# EAGLE board Schematic_and_CADSenior_Design_2 (EAGLE 9.6.0)
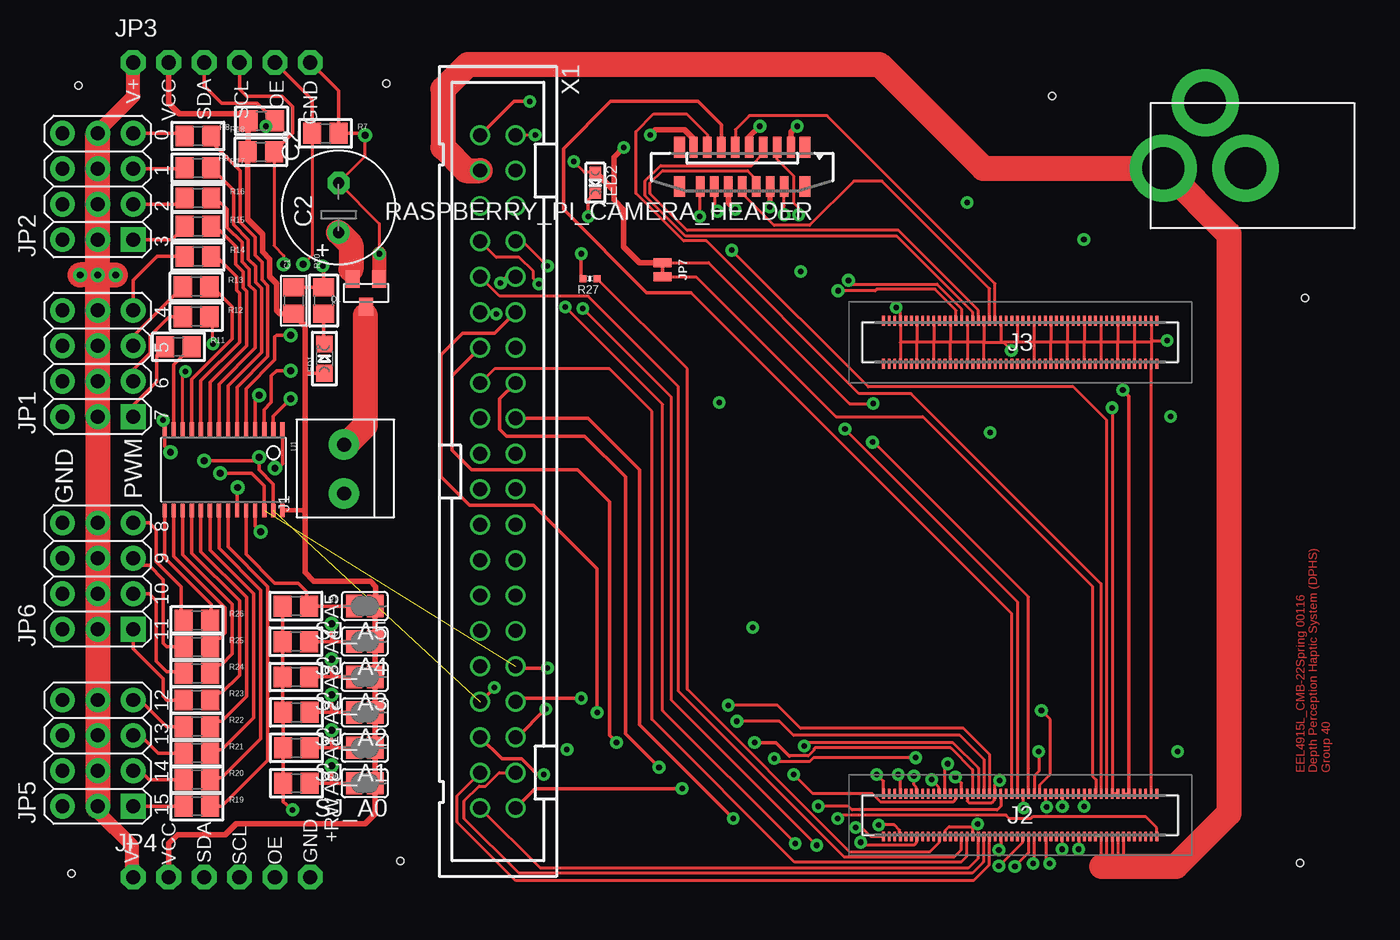
[diagram p0: board, top side]
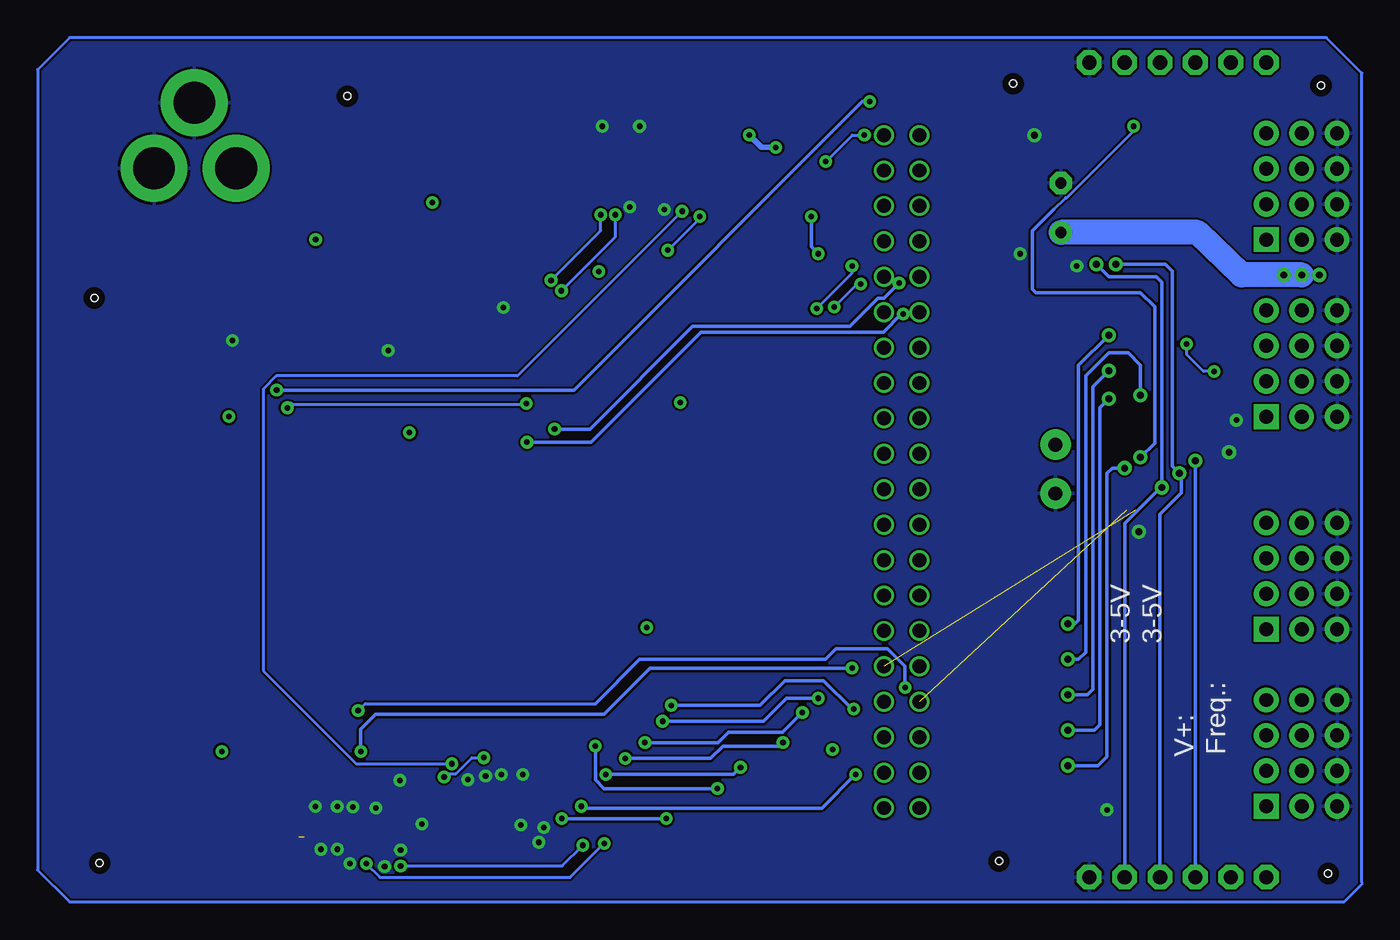
[diagram p1: board, bottom side, seen from below]

No outline drawn. Coordinates in mm, seen from the top.
Copper layers (1*16): Top 0.035mm / dielectric 1.5mm / Bottom 0.035mm
Design rules "PCBCart-Standard *": minimum track width 8mil, minimum drill 0.4mm, track to track 6mil, track to pad 6mil, pad to pad 6mil, via to via 6mil, smd to smd 6mil, copper to edge 20mil, drill to drill 8mil, minimum pad ring 8mil, minimum via ring 10mil, stop-mask expansion 3mil, vias tented up to drill 20mil, thermal gap 8mil
Holes 0.51 mm at 1.02,2.67 89.15,3.43 71.37,58.42 23.62,59.31 1.52,59.18 24.64,3.56 89.53,43.94

## Footprints (pad centres in the part's own frame; a part is rotated, then mirrored left to right if it is on the bottom)
0805@1 = smd 1.3 x 1.5: 1 -0.95,0; 2 0.95,0
E3,5-8 = drill 0.813 pad 1.6: + -1.778,0 | drill 0.813 pad 1.6 octagon: - 1.778,0
1X2-3.5MM = drill 1 pad 2.184: 1 1.8,0; 2 -1.7,0
DF40C100DS04V51 = smd 0.2 x 0.7: 1 -9.8,-1.54; 2 -9.8,1.54; 3 -9.4,-1.54; 4 -9.4,1.54; 5 -9,-1.54; 6 -9,1.54; 7 -8.6,-1.54; 8 -8.6,1.54; 9 -8.2,-1.54; 10 -8.2,1.54; 11 -7.8,-1.54; 12 -7.8,1.54; 13 -7.4,-1.54; 14 -7.4,1.54; 15 -7,-1.54; 16 -7,1.54; 17 -6.6,-1.54; 18 -6.6,1.54; 19 -6.2,-1.54; 20 -6.2,1.54; 21 -5.8,-1.54; 22 -5.8,1.54; 23 -5.4,-1.54; 24 -5.4,1.54; 25 -5,-1.54; 26 -5,1.54; 27 -4.6,-1.54; 28 -4.6,1.54; 29 -4.2,-1.54; 30 -4.2,1.54; 31 -3.8,-1.54; 32 -3.8,1.54; 33 -3.4,-1.54; 34 -3.4,1.54; 35 -3,-1.54; 36 -3,1.54; 37 -2.6,-1.54; 38 -2.6,1.54; 39 -2.2,-1.54; 40 -2.2,1.54; 41 -1.8,-1.54; 42 -1.8,1.54; 43 -1.4,-1.54; 44 -1.4,1.54; 45 -1,-1.54; 46 -1,1.54; 47 -0.6,-1.54; 48 -0.6,1.54; 49 -0.2,-1.54; 50 -0.2,1.54; 51 0.2,-1.54; 52 0.2,1.54; 53 0.6,-1.54; 54 0.6,1.54; 55 1,-1.54; 56 1,1.54; 57 1.4,-1.54; 58 1.4,1.54; 59 1.8,-1.54; 60 1.8,1.54; 61 2.2,-1.54; 62 2.2,1.54; 63 2.6,-1.54; 64 2.6,1.54; 65 3,-1.54; 66 3,1.54; 67 3.4,-1.54; 68 3.4,1.54; 69 3.8,-1.54; 70 3.8,1.54; 71 4.2,-1.54; 72 4.2,1.54; 73 4.6,-1.54; 74 4.6,1.54; 75 5,-1.54; 76 5,1.54; 77 5.4,-1.54; 78 5.4,1.54; 79 5.8,-1.54; 80 5.8,1.54; 81 6.2,-1.54; 82 6.2,1.54; 83 6.6,-1.54; 84 6.6,1.54; 85 7,-1.54; 86 7,1.54; 87 7.4,-1.54; 88 7.4,1.54; 89 7.8,-1.54; 90 7.8,1.54; 91 8.2,-1.54; 92 8.2,1.54; 93 8.6,-1.54; 94 8.6,1.54; 95 9,-1.54; 96 9,1.54; 97 9.4,-1.54; 98 9.4,1.54; 99 9.8,-1.54; 100 9.8,1.54
3X04 = drill 1 pad 1.778 square: 1 -3.81,-2.54 | drill 1 pad 1.778: 2 -3.81,0; 3 -3.81,2.54; 4 -1.27,-2.54; 5 -1.27,0; 6 -1.27,2.54; 7 1.27,-2.54; 8 1.27,0; 9 1.27,2.54; 10 3.81,-2.54; 11 3.81,0; 12 3.81,2.54
1X06-CLEANBIG = drill 1.016 pad 1.778 octagon: 1 -6.35,0; 2 -3.81,0; 3 -1.27,0; 4 1.27,0; 5 3.81,0; 6 6.35,0
SMT-JUMPER_2_NC_TRACE_NO-SILK = smd 0.635 x 1.27: 1 -0.508,0; 2 0.508,0
CHIPLED_0805 = smd 1.2 x 1.2: A 0,-1.05; C 0,1.05
CHIPLED_0603 = smd 0.8 x 0.8: A 0,-0.75; C 0,0.75
SOT23-WIDE = smd 1 x 1.27: 1 -0.95,-1; 2 0.95,-1; 3 0,1
0805 = smd 1.3 x 1.5: 1 -0.95,0; 2 0.95,0
_0402MP = smd 0.5 x 0.5: 1 -0.508,0; 2 0.508,0
52559-1592 = smd 0.6 x 1.5: 1 -3.5,-1.4; 2 -3,1.4; 3 -2.5,-1.4; 4 -2,1.4; 5 -1.5,-1.4; 6 -1,1.4; 7 -0.5,-1.4; 8 0,1.4; 9 0.5,-1.4; 10 1,1.4; 11 1.5,-1.4; 12 2,1.4; 13 2.5,-1.4; 14 3,1.4; 15 3.5,-1.4 | smd 0.8 x 1.5: M1 -4.5,-1.4; M2 4.5,-1.4; M3 4.5,1.4; M4 -4.5,1.4
SOLDERJUMPER_REFLOW_NOPASTE = smd 1.168 x 1.6: 1 -0.762,0; 2 0.762,0
TSSOP28 = smd 0.305 x 0.991: 1 -4.225,-2.918; 2 -3.575,-2.918; 3 -2.925,-2.918; 4 -2.275,-2.918; 5 -1.625,-2.918; 6 -0.975,-2.918; 7 -0.325,-2.918; 8 0.325,-2.918; 9 0.975,-2.918; 10 1.625,-2.918; 11 2.275,-2.918; 12 2.925,-2.918; 13 3.575,-2.918; 14 4.225,-2.918; 15 4.225,2.918; 16 3.575,2.918; 17 2.925,2.918; 18 2.275,2.918; 19 1.625,2.918; 20 0.975,2.918; 21 0.325,2.918; 22 -0.325,2.918; 23 -0.975,2.918; 24 -1.625,2.918; 25 -2.275,2.918; 26 -2.925,2.918; 27 -3.575,2.918; 28 -4.225,2.918
PJ-102A = drill 3 pad 4.8: RING 0.1,-3.39; RING_SW -4.6,-6.29; TIP 0.1,-9.29
PAK100/2500-40 = drill 1 pad 1.422: 1 -24.13,-1.27; 2 -24.13,1.27; 3 -21.59,-1.27; 4 -21.59,1.27; 5 -19.05,-1.27; 6 -19.05,1.27; 7 -16.51,-1.27; 8 -16.51,1.27; 9 -13.97,-1.27; 10 -13.97,1.27; 11 -11.43,-1.27; 12 -11.43,1.27; 13 -8.89,-1.27; 14 -8.89,1.27; 15 -6.35,-1.27; 16 -6.35,1.27; 17 -3.81,-1.27; 18 -3.81,1.27; 19 -1.27,-1.27; 20 -1.27,1.27; 21 1.27,-1.27; 22 1.27,1.27; 23 3.81,-1.27; 24 3.81,1.27; 25 6.35,-1.27; 26 6.35,1.27; 27 8.89,-1.27; 28 8.89,1.27; 29 11.43,-1.27; 30 11.43,1.27; 31 13.97,-1.27; 32 13.97,1.27; 33 16.51,-1.27; 34 16.51,1.27; 35 19.05,-1.27; 36 19.05,1.27; 37 21.59,-1.27; 38 21.59,1.27; 39 24.13,-1.27; 40 24.13,1.27

## Placement (x,y rotation side)
C1  10uF  [0805@1]  16.97,43.75 90 top
C2  [E3,5-8]  20.19,50.42 90 top
J1  TERMBLOCK_1X2-3.5MM  [1X2-3.5MM]  20.57,31.62 90 top
J2  P1-100  [DF40C100DS04V51]  69.09,6.86 0 top
J3  P101-200  [DF40C100DS04V51]  69.09,40.77 0 top
JP1  [3X04]  2.92,39.24 90 top
JP2  [3X04]  2.92,51.94 90 top
JP3  [1X06-CLEANBIG]  11.81,60.83 0 top
JP4  [1X06-CLEANBIG]  11.81,2.41 0 top
JP5  [3X04]  2.92,11.3 90 top
JP6  [3X04]  2.92,24 90 top
JP7  JUMPER-SMT_2_NC_TRACE_NO-SILK  [SMT-JUMPER_2_NC_TRACE_NO-SILK]  43.43,45.97 270 top
LED1  VCC  [CHIPLED_0805]  19.18,39.59 0 top
LED2  [CHIPLED_0603]  38.61,52.2 180 top
Q1  IRLML6401  [SOT23-WIDE]  22.16,44.31 180 top
R1  10K  [0805]  17.13,21.84 0 top
R2  10K  [0805]  17.13,19.3 0 top
R3  10K  [0805]  17.13,16.76 0 top
R4  10K  [0805]  17.16,14.22 0 top
R5  10K  [0805]  17.16,11.68 0 top
R6  10K  [0805]  17.16,9.14 0 top
R7  10K  [0805]  19.24,55.75 0 top
R8  10K  [0805]  14.67,56.64 180 top
R9  10K  [0805]  14.61,54.42 180 top
R10  220  [0805]  19.12,43.75 90 top
R11  220  [0805]  8.7,40.45 0 top
R12  220  [0805]  9.97,42.6 0 top
R13  220  [0805]  9.97,44.76 0 top
R14  220  [0805]  10.1,46.92 0 top
R15  220  [0805]  10.1,49.08 0 top
R16  220  [0805]  10.1,51.11 0 top
R17  220  [0805]  10.1,53.27 0 top
R18  220  [0805]  10.1,55.56 0 top
R19  220  [0805]  10.03,7.49 0 top
R20  220  [0805]  10.03,9.4 0 top
R21  220  [0805]  10.03,11.3 0 top
R22  220  [0805]  10.03,13.21 0 top
R23  220  [0805]  10.03,15.11 0 top
R24  220  [0805]  10.03,17.02 0 top
R25  220  [0805]  10.03,18.92 0 top
R26  220  [0805]  10.03,20.83 0 top
R27  1k  [_0402MP]  38.23,45.34 180 top
RASPBERRY_PI_CAMERA_HEADER  52559-1592  [52559-1592]  49.15,53.34 180 top
SJ_A0  [SOLDERJUMPER_REFLOW_NOPASTE]  22.07,9.14 180 top
SJ_A1  [SOLDERJUMPER_REFLOW_NOPASTE]  22.07,11.68 180 top
SJ_A2  [SOLDERJUMPER_REFLOW_NOPASTE]  22.07,14.22 180 top
SJ_A3  [SOLDERJUMPER_REFLOW_NOPASTE]  22.07,16.76 180 top
SJ_A4  [SOLDERJUMPER_REFLOW_NOPASTE]  22.07,19.3 180 top
SJ_A5  [SOLDERJUMPER_REFLOW_NOPASTE]  22.07,21.84 180 top
U1  PCA9685  [TSSOP28]  11.94,31.62 180 top
U$47  2.1MMJACKTHM  [PJ-102A]  88.65,53.34 270 top
X1  2540-  [PAK100/2500-40]  31.62,31.5 270 top

## Library data of the parts
C1 J1 JP1 JP2 JP5 JP6 LED1 Q1 R1-R26 SJ_A0 SJ_A1-SJ_A5 U1 = microbuilder
C2 JP3 JP4 U$47 = adafruit
J2 = SamacSys_Parts; DESCRIPTION: HIROSE(HRS) - DF40C-100DS-0.4V(51) - CONNECTOR, STACKING, RCPT, 100POS, 2ROW; HEIGHT: 1.65mm; MANUFACTURER_NAME: Hirose; MANUFACTURER_PART_NUMBER: DF40C-100DS-0.4V(51); MF: VISHAY; MOUSER_PART_NUMBER: 798-DF40C100DS0.4V51; MOUSER_PRICE-STOCK: https://www.mouser.co.uk/ProductDetail/Hirose-Connector/DF40C-100DS-04V51?qs=eDUdFcBPps2MEwbnuPvZzQ%3D%3D; MPN: MCW0406MD1003BP100; OC_NEWARK: 31W9017
J3 = SamacSys_Parts; DESCRIPTION: HIROSE(HRS) - DF40C-100DS-0.4V(51) - CONNECTOR, STACKING, RCPT, 100POS, 2ROW; HEIGHT: 1.65mm; MANUFACTURER_NAME: Hirose; MANUFACTURER_PART_NUMBER: DF40C-100DS-0.4V(51); MOUSER_PART_NUMBER: 798-DF40C100DS0.4V51; MOUSER_PRICE-STOCK: https://www.mouser.co.uk/ProductDetail/Hirose-Connector/DF40C-100DS-04V51?qs=eDUdFcBPps2MEwbnuPvZzQ%3D%3D; OC_NEWARK: unknown
JP7 = SparkFun-Jumpers; OC_NEWARK: unknown
LED2 = microbuilder; MF: OSRAM; MPN: LS Q976-NR-1; OC_NEWARK: 32AC1319
R27 = microbuilder; MF: PANASONIC; MPN: ERJ-8ENF1001V; OC_NEWARK: 64R5430
RASPBERRY_PI_CAMERA_HEADER = con-molex; OC_FARNELL: unknown; OC_NEWARK: unknown
X1 = con-3m; OC_FARNELL: unknown; OC_NEWARK: unknown

## Nets
1.8V: J2.88 J2.90 X1.1
3.3V: J2.84 J2.86 JP7.1 LED2.A RASPBERRY_PI_CAMERA_HEADER.15 X1.2
5.0V: C2.+ JP1.2 JP1.5 JP1.8 JP1.11 JP2.2 JP2.5 JP2.8 JP2.11 JP3.1 JP4.1 JP5.2 JP5.5 JP5.8 JP5.11 JP6.2 JP6.5 JP6.8 JP6.11 Q1.2
5V: J2.77 J2.79 J2.81 J2.83 J2.85 J2.87 U$47.TIP X1.3
A0: R6.2 SJ_A0.2 U1.1
A1: R5.2 SJ_A1.2 U1.2
A2: R4.2 SJ_A2.2 U1.3
A3: R3.2 SJ_A3.2 U1.4
A4: R2.2 SJ_A4.2 U1.5
A5: R1.2 SJ_A5.2 U1.24
CAM0_C_N: J3.40 RASPBERRY_PI_CAMERA_HEADER.8
CAM0_C_P: J3.42 RASPBERRY_PI_CAMERA_HEADER.9
CAM0_D0_N: J3.28 RASPBERRY_PI_CAMERA_HEADER.2
CAM0_D0_P: J3.30 RASPBERRY_PI_CAMERA_HEADER.3
CAM0_D1_N: J3.34 RASPBERRY_PI_CAMERA_HEADER.5
CAM0_D1_P: J3.36 RASPBERRY_PI_CAMERA_HEADER.6
CAM1_C_N: J3.27
CAM1_C_P: J3.29
CAM1_D2_N: J3.33
CAM1_D2_P: J3.35
CAM1_D3_N: J3.39
CAM1_D3_P: J3.41
CAM_IO0 [CAMIO]: J2.48 RASPBERRY_PI_CAMERA_HEADER.11
CAM_IO1 [CAMIO]: J2.24 RASPBERRY_PI_CAMERA_HEADER.12
CAM_SCL: J2.80 RASPBERRY_PI_CAMERA_HEADER.13
CAM_SDA: J2.82 RASPBERRY_PI_CAMERA_HEADER.14
GND: C1.2 C2.- J1.2 J2.1 J2.2 J2.7 J2.8 J2.13 J2.14 J2.22 J2.23 J2.32 J2.33 J2.42 J2.43 J2.52 J2.53 J2.59 J2.60 J2.65 J2.66 J2.71 J2.74 J2.98 J3.7 J3.8 J3.13 J3.14 J3.19 J3.20 J3.25 J3.26 J3.31 J3.32 J3.37 J3.38 J3.44 J3.50 J3.55 J3.56 J3.61 J3.62 J3.67 J3.68 J3.73 J3.74 J3.79 J3.80 J3.85 J3.86 J3.91 J3.92 J3.97 J3.98 JP1.3 JP1.6 JP1.9 JP1.12 JP2.3 JP2.6 JP2.9 JP2.12 JP3.6 JP4.6 JP5.3 JP5.6 JP5.9 JP5.12 JP6.3 JP6.6 JP6.9 JP6.12 Q1.1 R1.1 R2.1 R3.1 R4.1 R5.1 R6.1 R7.2 R10.2 RASPBERRY_PI_CAMERA_HEADER.1 RASPBERRY_PI_CAMERA_HEADER.4 RASPBERRY_PI_CAMERA_HEADER.7 RASPBERRY_PI_CAMERA_HEADER.10 U1.14 U1.25 U$47.RING U$47.RING_SW
GPIO4: J2.54 X1.11
GPIO5: J2.34 X1.12
GPIO6: J2.30 X1.13
GPIO14: J2.55 X1.7
GPIO15: J2.51 X1.8
GPIO16: J2.29 X1.9
GPIO17: J2.50 X1.10
GPIO_VREF: J2.78 JP7.2
I2C_LIDAR_SCL_0: J2.35 X1.39
I2C_LIDAR_SDA_0: J2.36 X1.40
N$1: LED1.C R10.1
N$2: JP1.4 R12.1
N$3: JP1.1 R11.1
N$4: JP1.7 R13.1
N$5: JP1.10 R14.1
N$6: JP2.1 R15.1
N$7: JP2.4 R16.1
N$8: JP2.7 R17.1
N$9: JP2.10 R18.1
N$10: JP6.10 R26.1
N$11: JP6.7 R25.1
N$12: JP6.4 R24.1
N$13: JP6.1 R23.1
N$14: JP5.10 R22.1
N$15: JP5.7 R21.1
N$16: JP5.4 R20.1
N$17: JP5.1 R19.1
N$18: LED2.C R27.2
N$19: J2.19
N$20: J3.2
N$21: J3.4
N$22: J3.6
N$24: J3.10
N$25: J2.25
N$26: J3.11
N$27: J2.27
N$28: J3.12
N$29: X1.4
N$30: X1.5
N$31: J3.15
N$32: J3.16
N$33: J3.17
N$35: J3.18
N$36: J3.21
N$37: J3.22
N$41: J2.41
N$42: J3.23
N$43: J3.24
N$45: J2.45
N$46: J2.46
N$47: J2.47
N$53: X1.14
N$56: J2.57
N$60: X1.17
N$62: X1.19
N$64: X1.20
N$65: X1.21
N$67: X1.22
N$68: J2.68
N$69: X1.23
N$70: J2.70
N$71: X1.24
N$72: J2.72
N$75: X1.25
N$77: X1.26
N$78: J3.43
N$79: X1.27
N$80: X1.28
N$81: J3.45
N$83: J3.46
N$84: J3.47
N$85: J3.48
N$86: J3.49
N$87: X1.29
N$88: X1.30
N$90: J3.52
N$92: X1.31
N$93: J3.54
N$96: X1.6
N$99: J3.57
N$100: J3.58
N$101: J3.59
N$102: J3.60
N$105: J3.63
N$106: J3.64
N$107: J3.65
N$108: J3.66
N$110: J2.75
N$111: J3.69
N$112: J2.73
N$113: J3.71
N$114: J2.67
N$115: J2.69
N$116: J2.63
N$117: J3.75
N$118: J2.61
N$119: J3.77
N$121: J2.26
N$123: J3.81
N$125: J3.83
N$129: J3.87
N$131: J3.89
N$135: J3.93
N$136: J3.94
N$137: J3.95
N$138: J3.96
OE: JP3.5 JP4.5 R7.1 U1.23
PI_NLED_ACTIVITY: J2.21 R27.1
POWER: J2.99 X1.18
PWM0: R18.2 U1.6
PWM1: R17.2 U1.7
PWM2: R16.2 U1.8
PWM3: R15.2 U1.9
PWM4: R14.2 U1.10
PWM5: R13.2 U1.11
PWM6: R12.2 U1.12
PWM7: R11.2 U1.13
PWM8: R26.2 U1.15
PWM9: R25.2 U1.16
PWM10: R24.2 U1.17
PWM11: R23.2 U1.18
PWM12: R22.2 U1.19
PWM13: R21.2 U1.20
PWM14: R20.2 U1.21
PWM15: R19.2 U1.22
PWRIN: J1.1 Q1.3
SCL: J2.56 JP3.4 JP4.4 R9.1 U1.26 X1.32
SDA: J2.58 JP3.3 JP4.3 R8.1 U1.27 X1.33
SPEAKER0: J2.31 X1.15
SPEAKER1: J2.28 X1.16
SPI_ACCELEROMETER_CE0_N: J2.39 X1.37
SPI_ACCELEROMETER_CE1_N: J2.37 X1.38
SPI_ACCELEROMETER_MIS0: J2.40 X1.36
SPI_ACCELEROMETER_MOS1: J2.44 X1.35
SPI_ACCELEROMETER_SCLK: J2.38 X1.34
VCC: C1.1 JP3.2 JP4.2 LED1.A R8.2 R9.2 SJ_A0.1 SJ_A1.1 SJ_A2.1 SJ_A3.1 SJ_A4.1 SJ_A5.1 U1.28

## Tracks (layer width: path | path; a pad name or v marks a point on that pad's centre or on a via)
1.8V  (via drill 0.4)
  Top 0.203: J2.88 J2.90
  Top 0.254: J2.90 76.89,36.9 v76.45,37.34 | v33.91,58.04 32.77,58.04 X1.1
  Bottom 0.254: v76.45,37.34 55.12,37.34 34.42,58.04 v33.91,58.04
3.3V  (via drill 0.4)
  Top 0.203: v58.55,36.38 56.84,36.38 46.74,46.48 JP7.1 | J2.86 J2.84 v75.69,36.07 | LED2.A 37.83,52.95 v37.05,53.72 | v34.29,55.63 X1.2
  Top 0.381: 39.94,51.62 LED2.A | 39.94,51.62 39.94,50.98 40.64,50.28 40.64,47.62 41.78,46.48 JP7.1 | 39.94,51.62 39.94,54.03 v40.64,54.74 | v42.55,55.63 42.93,56.01 45.02,56.01 45.65,55.38 RASPBERRY_PI_CAMERA_HEADER.15
  Bottom 0.203: 75.44,36.32 58.6,36.32 | v37.05,53.72 35.15,55.63 v34.29,55.63
  Bottom 0.381: v75.69,36.07 75.44,36.32 | 58.6,36.32 v58.55,36.38 | v40.64,54.74 41.66,54.74 v42.55,55.63
5.0V  (via drill 0.5)
  Top 0.254: 21.08,45.97 21.08,45.44 Q1.2 | JP2.11 2.92,55.88 | JP5.2 2.92,7.11
  Top 1.016: JP3.1 5.46,58.42 2.92,55.88 | 2.92,7.11 5.33,4.7 5.33,2.54 JP4.1
  Top 1.778: JP2.11 JP2.8 JP2.5 JP2.2 v2.92,45.59 | v2.92,45.59 JP1.11 JP1.8 JP1.5 JP1.2 JP6.11 JP6.8 JP6.5 JP6.2 JP5.11 JP5.8 JP5.5 JP5.2 | C2.+ 21.08,47.75 21.08,45.97 | v2.92,45.59 v4.19,45.59 | v2.92,45.59 v1.65,45.59
  Bottom 1.778: C2.+ 10.41,48.64 7.24,45.59 v2.92,45.59
5V  (1 unrouted)
  Top 0.203: J2.79 74.89,3.22 74.93,3.17 75.29,3.53 | J2.87 76.49,3.27 | 76.49,3.27 76.58,3.17 | J2.85 76.09,3.67 76.49,3.27 | J2.83 75.69,3.93 75.29,3.53 | J2.81 75.29,3.53
  Top 1.778: X1.3 29.34,53.09 27.69,54.74 27.69,58.93 29.46,60.71 58.98,60.71 66.45,53.24 U$47.TIP 84.07,48.52 84.07,6.99 80.26,3.17 76.58,3.17 74.93,3.17
A0  (via drill 0.5)
  Top 0.254: 19.68,9.14 SJ_A0.2 | v19.68,10.41 19.68,9.14 | 19.68,9.14 R6.2 | v15.62,31.75 15.88,31.75 16.16,32.04 U1.1
  Bottom 0.254: v19.68,10.41 17.53,10.41 16.89,11.05 16.89,31.37 16.51,31.75 v15.62,31.75
A1  (via drill 0.5)
  Top 0.254: 19.68,11.68 SJ_A1.2 | v19.68,12.95 19.68,11.68 | 19.68,11.68 R5.2 | U1.2 15.51,35.45 v16.76,36.7
  Bottom 0.254: v19.68,12.95 17.78,12.95 17.4,13.34 17.4,36.07 v16.76,36.7
A2  (via drill 0.5)
  Top 0.254: 19.68,14.22 SJ_A2.2 | v19.68,15.49 19.68,14.22 | 19.68,14.22 R4.2 | U1.3 14.86,35.95 15.37,36.45 15.37,38.35 15.75,38.73 v16.76,38.73
  Bottom 0.254: v19.68,15.49 18.29,15.49 17.91,15.88 17.91,37.59 v16.76,38.73
A3  (via drill 0.5)
  Top 0.254: 19.68,16.76 SJ_A3.2 | v19.68,18.03 19.68,16.76 | 19.68,16.76 R3.2 | U1.4 14.21,36.69 v14.48,36.96
  Bottom 0.254: v19.68,18.03 18.92,18.03 18.41,18.54 18.41,38.35 16.76,40.01 15.37,40.01 14.48,39.12 v14.48,36.96
A4  (via drill 0.5)
  Top 0.254: 19.68,19.3 SJ_A4.2 | v19.68,20.57 19.68,19.3 | 19.68,19.3 R2.2 | v16.76,41.27 15.75,41.27 15.62,41.15 15.62,39.5 13.56,37.44 U1.5
  Bottom 0.254: v19.68,20.57 19.18,20.57 18.92,20.83 18.92,39.12 v16.76,41.27
A5
  Top 0.254: U1.24 13.56,25.55 15.62,23.5 17.27,23.5 17.91,22.86 17.91,22.02 R1.2 SJ_A5.2
CAM0_C_N
  Top 0.203: J3.40 66.89,44.62 59.18,52.32 57.15,52.32 53.98,49.15 51.44,49.15 49.15,51.44 RASPBERRY_PI_CAMERA_HEADER.8
CAM0_C_P
  Top 0.203: J3.42 67.29,44.98 55.24,57.02 49.66,57.02 48.65,56.02 RASPBERRY_PI_CAMERA_HEADER.9
CAM0_D0_N  (via drill 0.4)
  Top 0.203: J3.28 64.49,43.06 62.97,44.58 58.8,44.58 58.69,44.46 v56.02,44.46 | RASPBERRY_PI_CAMERA_HEADER.2 52.15,50.78 52.15,50.57 v52.15,49.91
  Bottom 0.203: v56.02,44.46 52.15,48.33 v52.15,49.91
CAM0_D0_P  (via drill 0.4)
  Top 0.203: v56.77,45.21 57.05,44.93 63.12,44.93 64.89,43.17 J3.30 | RASPBERRY_PI_CAMERA_HEADER.3 51.65,53.89 52.85,52.68 52.85,50.74 53.21,50.38 v53.21,49.91
  Bottom 0.203: v56.77,45.21 53.21,48.77 v53.21,49.91
CAM0_D1_N
  Top 0.203: J3.34 65.69,42.94 60.24,48.39 45.09,48.39 42.19,51.29 42.19,52.34 43.29,53.44 49.8,53.44 50.65,54.29 RASPBERRY_PI_CAMERA_HEADER.5
CAM0_D1_P
  Top 0.203: J3.36 66.09,43.06 60.36,48.79 45.19,48.79 42.55,51.44 42.55,52.2 43.43,53.09 49.53,53.09 50.15,52.47 RASPBERRY_PI_CAMERA_HEADER.6
CAM_IO0
  Top 0.203: 45.97,58.04 46.04,57.98 | 45.47,44.32 68.49,21.3 J2.48
  Top 0.254: 45.47,44.32 42.29,44.32 36.32,50.29 36.32,54.65 39.71,58.04 45.97,58.04 | 46.04,57.98 47.65,56.36 RASPBERRY_PI_CAMERA_HEADER.11
CAM_IO1  (via drill 0.4)
  Top 0.203: J2.24 63.69,10.35 v63.88,10.54 | RASPBERRY_PI_CAMERA_HEADER.12 47.15,50.39 v47.37,50.16
  Bottom 0.203: v47.37,50.16 59.18,38.35 76.47,38.35 77.42,37.41 77.42,17.22 70.74,10.54 v63.88,10.54
CAM_SCL
  Top 0.203: RASPBERRY_PI_CAMERA_HEADER.13 46.65,55.66 45.16,57.15 42.8,57.15 41.53,55.88 41.53,51.45 44.94,48.03 46.58,48.03 57.53,37.08 61.26,37.08 74.89,23.45 J2.80
CAM_SDA  (via drill 0.4)
  Top 0.203: v48.39,47.37 58.19,37.57 72.92,37.57 75.29,35.2 J2.82 | v46.1,49.78 46.1,51.89 RASPBERRY_PI_CAMERA_HEADER.14
  Bottom 0.203: v48.39,47.37 46.1,49.66 v46.1,49.78
GND  (via drill 0.4, 0.5)
  Top 0.203: J3.20 62.89,40.77 | J3.19 62.89,40.77 | 60.49,40.77 J3.8 60.49,42.97 v60.2,43.26 | 60.49,40.77 J3.7 | J3.13 61.69,40.77 | J3.14 61.69,40.77 | J3.26 64.09,40.77 | J3.25 64.09,40.77 | J3.32 65.29,40.77 | 65.29,40.77 J3.31 | J3.38 66.49,40.77 | J3.37 66.49,40.77 | J3.44 67.69,40.77 | 66.49,40.77 67.69,40.77 | 66.49,40.77 65.29,40.77 | 65.29,40.77 64.09,40.77 | 64.09,40.77 62.89,40.77 | 62.89,40.77 61.69,40.77 | 61.69,40.77 60.49,40.77 | J3.56 70.09,40.77 | 70.09,40.77 J3.55 | 70.09,40.77 68.83,40.77 | 68.83,40.77 67.87,40.77 | J3.68 72.49,40.77 | J3.67 72.49,40.77 | J3.61 71.29,40.77 | J3.62 71.29,40.77 | J3.74 73.69,40.77 | J3.73 73.69,40.77 | J3.80 74.89,40.77 | 74.89,40.77 J3.79 | J3.86 76.09,40.77 | J3.85 76.09,40.77 | J3.92 77.29,40.77 | 77.29,40.77 J3.91 | J3.98 78.49,41.02 | 78.49,41.02 78.49,40.77 | 78.49,40.77 J3.97 J2.98 | 78.49,40.77 77.29,40.77 | 77.29,40.77 76.09,40.77 | 76.09,40.77 74.89,40.77 | 74.89,40.77 73.69,40.77 | 73.69,40.77 72.49,40.77 | 72.49,40.77 71.29,40.77 | 71.29,40.77 70.09,40.77 | J3.50 68.89,40.82 68.83,40.77 | 67.69,40.77 67.87,40.77 | 67.87,40.77 v68.45,40.18 | v71.2,3.39 70.94,3.65 70.94,4.22 70.93,4.23 70.93,5.27 J2.59 | v67.62,9.35 67.29,9.02 J2.42 67.24,8.35 67.24,7.94 67.05,7.75 65.41,7.75 65.29,7.86 J2.32 | v22.1,55.63 22.1,54.1 C2.- 23.11,49.28 v23.11,47.12 | 78.49,41.02 78.61,40.89 v79.63,40.89 | U1.14 7.71,35.07 v7.6,35.18 | 19.12,46.16 v19.05,46.23 | J2.65 v72.09,4.41 | J2.71 v73.29,4.41 | J2.53 69.69,4.16 v68.71,3.17 | J2.52 69.29,7.42 v69.34,7.37 | J2.60 70.89,7.55 v70.99,7.44 | J2.66 72.11,8.38 v72.11,7.47 | J2.74 v73.69,7.49 v73.67,7.48 | J2.22 63.24,8.44 63.24,8.85 62.74,9.36 v62.74,9.4 | J2.14 61.64,8.44 61.64,8.85 61.47,9.03 v61.47,9.65
  Top 0.203: J2.8 60.49,9.62 v60.33,9.78 | J2.2 59.29,9.29 v58.8,9.78 | J2.43 67.69,4.49 v67.56,4.36 | J2.33 65.69,5.87 65.85,6.03 | 65.85,6.03 v66.04,6.22 | J2.13 61.64,5.27 61.64,4.86 61.49,4.71 57.83,4.71 57.66,4.89 v57.66,4.91 | J2.7 60.44,5.36 60.44,5.77 60.06,6.15 v58.93,6.15 | J2.1 58.4,5.32 57.75,5.97 v57.28,5.97 | J2.23 63.73,5.36 63.73,5.77 63.99,6.03 65.85,6.03
  Top 0.254: v23.11,47.12 22.83,47.09 | R1.1 R2.1 R3.1 16.18,14.26 R4.1 R5.1 R6.1 16.21,7.83 v16.89,7.24 | 17.03,44.77 C1.2 R10.2 19.12,46.16 | U1.14 7.71,33.31 v8.13,32.89 | U1.25 14.21,27.57 v14.61,27.18 | JP3.6 20.19,58.8 R7.2 21.97,55.75 v22.1,55.63
  Top 0.381: RASPBERRY_PI_CAMERA_HEADER.7 49.65,55.49 v50.42,56.26 | RASPBERRY_PI_CAMERA_HEADER.1 52.65,55.82 v53.09,56.26 | RASPBERRY_PI_CAMERA_HEADER.10 48.15,50.78 v48.64,50.29 | RASPBERRY_PI_CAMERA_HEADER.4 51.15,50.51 v51.11,50.48
  Top 1.016: Q1.1 v23.11,47.12
  Bottom 0.203: v7.6,35.18 7.6,35.45 7.49,35.56 | v19.05,46.23 19.05,46.61
  Bottom 0.254: v22.1,55.63 21.84,55.5
  pour Bottom: -2.54,1.91 0.25,-0.89 0.25,-1.02 92.96,-1.02 93.09,-0.89 95.12,1.14 95.12,3.17 95.38,3.43 95.38,61.34 92.71,64.01 91.95,64.01 0.51,64.01 0.25,63.75 -2.79,60.71 -2.79,60.45 -2.79,2.16
GPIO4  (via drill 0.4)
  Top 0.203: J2.54 69.69,10.2 69.69,22.51 58.6,33.6
  Top 0.254: 58.6,33.6 v58.49,33.6 | v31.5,42.8 30.48,42.8 X1.11
  Bottom 0.254: v58.49,33.6 53.9,33.6 46,41.5 32.91,41.5 31.62,42.8 v31.5,42.8
GPIO5  (via drill 0.4)
  Top 0.203: 52.55,11.07 52.58,11.1 53.89,11.1 54.3,11.52 54.3,11.63 54.36,11.68 64.1,11.68 65.67,10.12 65.67,8.42 J2.34
  Top 0.254: 52.55,11.07 51.56,12.06 v50.04,12.06 v50.03,12.06 | v38.73,14.22 38.73,24.51 34.16,29.08 29.59,29.08 27.56,31.11 27.56,39.88 29.08,41.4 31.37,41.4 X1.12
  Bottom 0.254: v50.03,12.06 44.78,12.06 44.04,12.8 40.16,12.8 v38.73,14.22
GPIO6  (via drill 0.4)
  Top 0.203: J2.30 64.89,9.15 v64.44,9.6 | v61.59,10.98 54.26,10.98 53.98,10.69 52.07,10.69 51.97,10.69 51.66,10.69 v51.44,10.92
  Top 0.254: v40.13,12.06 39.62,12.57 39.62,29.34 37.34,31.62 29.72,31.62 28.32,33.02 28.32,38.35 X1.13
  Bottom 0.203: v64.44,9.6 64.21,9.83 63.59,9.83 62.45,10.98 v61.59,10.98
  Bottom 0.254: v51.44,10.92 45.34,10.92 44.45,11.81 40.39,11.81 v40.13,12.06
GPIO14  (via drill 0.4)
  Top 0.203: J2.55 70.09,3.44 v70.03,3.38 | v52.96,4.83 43.43,14.35 43.43,36.32 v36.45,43.31 | v34.54,44.96 34.16,45.34 34.16,45.85 33.15,46.86 31.5,46.86 X1.7
  Bottom 0.203: v70.03,3.38 69.03,2.38 55.4,2.38 v52.96,4.83 | v36.45,43.31 34.8,44.96 v34.54,44.96
GPIO15  (via drill 0.4)
  Top 0.203: J2.51 69.24,5.27 69.24,4.86 67.6,3.22 v67.56,3.22 | v54.48,4.7 44.07,15.11 44.07,36.83 v37.72,43.18 | v35.18,46.23 33.4,48.01 X1.8
  Bottom 0.203: v67.56,3.22 55.96,3.22 v54.48,4.7 | v37.72,43.18 35.18,45.72 v35.18,46.23
GPIO16
  Top 0.203: J2.29 64.84,5.27 64.84,4.36 64.34,3.85 56.48,3.85 44.58,15.75 44.58,37.59 38.1,44.07 31.75,44.07 X1.9
GPIO17  (via drill 0.4)
  Top 0.203: v56.52,34.54 68.89,22.17 J2.50
  Top 0.254: v31.81,45.01 32.26,45.47 X1.10
  Bottom 0.254: v56.52,34.54 53.98,34.54 46.61,41.91 35.31,41.91 33.3,43.92 32.9,43.92 v31.81,45.01
GPIO_VREF
  Top 0.203: JP7.2 45.85,45.47 55.88,35.43 62.1,35.43 74.28,23.26 74.28,9.65 74.53,9.4 74.53,8.44 J2.78
I2C_LIDAR_SCL_0
  Top 0.203: J2.35 66.04,5.27 66.04,3.72 65.37,3.05 34.67,3.05 X1.39
I2C_LIDAR_SDA_0  (via drill 0.4)
  Top 0.203: 53.85,12.06 64.26,12.06 66.09,10.24 J2.36
  Top 0.254: v44.83,8.76 34.29,8.76 X1.40 | v53.59,11.81 53.85,12.06
  Bottom 0.254: v53.59,11.81 53.59,9.4 52.96,8.76 v44.83,8.76
N$1
  Top 0.254: LED1.C 19.12,40.7 R10.1
N$2
  Top 0.254: JP1.4 5.46,38.79 6.68,40.01 6.68,41.24 8.04,42.6 R12.1
N$3
  Top 0.254: R11.1 7.14,39.83 7.14,37.92 5.46,36.25 JP1.1
N$4
  Top 0.254: JP1.7 5.46,41.2 R13.1
N$5
  Top 0.203: 5.46,44.45 5.46,44.58
  Top 0.254: JP1.10 5.46,44.45 | 5.46,44.58 5.46,45.21 7.17,46.92 R14.1
N$6
  Top 0.254: JP2.1 8.2,48.13 R15.1
N$7
  Top 0.254: JP2.4 8.71,50.67 R16.1
N$8
  Top 0.203: 9.09,53.21 R17.1
  Top 0.254: JP2.7 9.09,53.21
N$9
  Top 0.203: 8.95,55.75 R18.1
  Top 0.254: JP2.10 7.62,55.75 8.13,55.75 8.95,55.75
N$10
  Top 0.254: JP6.10 6.6,27.81 7.11,27.3 7.11,25.02 8.89,23.24 8.89,20.89 R26.1
N$11
  Top 0.254: R25.1 7.87,18.92 7.62,19.18 7.62,23.75 6.6,24.77 5.97,24.77 JP6.7
N$12
  Top 0.254: R24.1 8.83,17.14 7.87,17.14 7.11,17.91 7.11,22.23 6.6,22.73 JP6.4
N$13
  Top 0.254: R23.1 7.87,15.11 7.62,15.37 7.62,16.64 5.46,18.8 JP6.1
N$14
  Top 0.254: R22.1 7.87,13.21 5.97,15.11 JP5.10
N$15
  Top 0.254: R21.1 7.24,11.3 5.97,12.57 JP5.7
N$16
  Top 0.254: R20.1 6.6,9.4 5.97,10.03 JP5.4
N$17
  Top 0.254: JP5.1 R19.1
N$18  (via drill 0.4)
  Top 0.254: LED2.C 38.1,50.94 v38.1,49.78 | v37.59,47.12 37.59,45.47 R27.2
  Bottom 0.254: v38.1,49.78 38.1,47.62 v37.59,47.12
N$23  (via drill 0.4)
  other vias: 73.66,48.13
N$34  (via drill 0.4)
  other vias: 65.28,50.8
N$38  (via drill 0.4)
  other vias: 80.39,11.43
N$39  (via drill 0.4)
  other vias: 79.88,35.43
N$40  (via drill 0.4)
  other vias: 66.93,34.29
N$44  (via drill 0.4)
  other vias: 47.5,36.45
N$48  (via drill 0.4)
  other vias: 49.91,20.32
N$49  (via drill 0.4)
  other vias: 36.58,11.56
N$51  (via drill 0.4)
  other vias: 53.34,45.85
N$52
  Bottom 0.203: -1.4,1.91 -0.13,0.64 91.31,0.64 93.6,2.92 93.6,60.33 91.31,62.61 1.14,62.61 -1.4,60.07 -1.4,2.03
OE  (via drill 0.5)
  Top 0.203: R7.1 18.29,46.99 v17.65,46.35
  Top 0.254: U1.23 12.91,30.31 v12.95,30.35 | JP3.5 18.29,58.16 R7.1
  Bottom 0.254: JP4.5 15.62,27.77 12.91,30.48 12.91,30.31 v12.95,30.35 12.95,45.09 13.34,45.47 16.76,45.47 v17.65,46.35
PI_NLED_ACTIVITY
  Top 0.203: R27.1 45.21,38.86 45.21,15.88 56.88,4.21 62.59,4.21 63.29,4.91 J2.21
POWER  (via drill 0.4)
  Top 0.203: J2.99 78.89,5.95 78.11,6.73 69.98,6.73 69.85,6.6 68.33,6.6 68.07,6.86 56.26,6.86 v56.01,6.6
  Top 0.254: v48.51,6.6 41.78,13.34 41.78,31.62 38.1,35.31 X1.18
  Bottom 0.254: v56.01,6.6 v48.51,6.6
PWM0
  Top 0.254: U1.6 12.91,37.55 15.11,39.75 15.11,44.84 14.71,45.24 14.71,46.52 14.2,47.02 14.2,48.29 13.12,49.37 13.12,53.07 11.05,55.14 R18.2
PWM1
  Top 0.254: U1.7 12.26,37.66 14.66,40.06 14.66,44.65 14.25,45.06 14.25,46.2 13.72,46.74 13.72,48.13 12.66,49.18 12.66,51.66 R17.2
PWM2
  Top 0.254: U1.8 11.61,37.77 14.2,40.36 14.2,43.69 14.2,43.94 14.2,44.46 13.79,44.87 13.79,46.01 13.26,46.55 13.26,47.94 12.21,48.99 12.21,50.29 11.39,51.11 R16.2
PWM3
  Top 0.254: U1.9 10.96,37.89 13.59,40.51 13.59,44.42 13.34,44.68 13.34,45.82 12.8,46.36 12.8,47.65 11.37,49.08 R15.2
PWM4
  Top 0.254: U1.10 10.31,38 13.08,40.77 13.08,44.28 12.88,44.49 12.88,45.47 11.42,46.92 R14.2
PWM5
  Top 0.254: U1.11 9.66,38.11 12.57,41.02 12.57,43.31 11.12,44.76 R13.2
PWM6  (via drill 0.4)
  Top 0.203: U1.12 9.01,38.5 v9.2,38.68 | v11.16,40.65 11.16,42.36 R12.2
  Bottom 0.203: v9.2,38.68 9.96,38.68 11.16,39.89 v11.16,40.65
PWM7
  Top 0.254: U1.13 8.36,38.46 8.36,39.16 R11.2
PWM8
  Top 0.254: U1.15 7.71,25.31 11.05,21.97 11.05,21.02 R26.2
PWM9
  Top 0.254: U1.16 8.36,25.42 12.06,21.72 12.06,19.94 11.68,19.56 11.49,19.56 R25.2
PWM10
  Top 0.254: U1.17 9.01,25.53 12.57,21.97 12.57,18.41 11.81,17.65 11.49,17.65 R24.2
PWM11
  Top 0.254: U1.18 9.66,25.64 13.08,22.23 13.08,16.89 11.81,15.62 11.36,15.62 R23.2
PWM12
  Top 0.254: U1.19 10.31,25.75 13.59,22.48 13.59,15.37 11.81,13.59 11.24,13.59 R22.2
PWM13
  Top 0.254: U1.20 10.96,25.87 14.1,22.73 14.1,13.84 11.81,11.56 11.11,11.56 R21.2
PWM14
  Top 0.254: U1.21 11.61,25.98 14.61,22.99 14.61,12.32 11.81,9.53 10.98,9.53 R20.2
PWM15
  Top 0.254: U1.22 12.26,26.09 15.11,23.24 15.11,10.79 11.81,7.49 R19.2
PWRIN
  Top 0.254: 22.1,42.67 22.1,43.24 Q1.3
  Top 1.778: J1.1 20.72,33.42 22.1,34.8 22.1,42.67
SCL  (via drill 0.4, 0.5)  (1 unrouted)
  Top 0.203: R9.1 15.55,47.69 16.26,46.99 v16.26,46.35 | v70.42,11.43 70.42,10 70.11,9.69 70.11,8.42 J2.56
  Top 0.254: v11.68,31.37 13.97,31.37 14.86,30.48 U1.26 | JP3.4 13.08,58.93 13.59,58.42 16.13,58.42 16.89,57.66 16.89,55.76 R9.1 | v35.18,17.4 33.02,17.4 X1.32
  Bottom 0.254: JP4.4 13.08,28.45 11.56,29.97 11.56,31.24 v11.68,31.37 12.19,31.88 12.19,45.85 12.7,46.35 v16.26,46.35 | v70.42,11.43 70.42,13.02 69.34,14.1 52.96,14.1 49.66,17.4 v35.18,17.4
SDA  (via drill 0.4, 0.5)  (1 unrouted)
  Top 0.203: J2.58 70.49,9.02 71.25,9.78 71.25,13.72 v70.61,14.35 | v14.99,56.26 15.37,56.64 R8.1
  Top 0.254: U1.27 15.51,30.59 14.48,31.62 v14.48,32.51 14.22,32.26 v10.54,32.26 | JP3.3 10.54,59.18 11.81,57.91 14.35,57.91 R8.1 | v31.37,16 X1.33
  Bottom 0.203: v70.61,14.35 70.1,14.86 53.59,14.86 | 20.7,50.29 19.85,51.14 19.76,51.14 14.99,55.91 v14.99,56.26
  Bottom 0.254: v10.54,32.26 JP4.3 | 20.7,50.29 22.23,48.77 22.23,44.58 21.97,44.32 14.48,44.32 13.46,43.31 13.46,33.53 v14.48,32.51 | 53.59,14.86 50.42,18.03 37.08,18.03 36.32,18.8 32.64,18.8 31.37,17.53 v31.37,16
SPEAKER0
  Top 0.203: J2.31 65.24,5.27 65.24,3.87 64.85,3.48 52.91,3.48 42.67,13.72 42.67,35.81 39.62,38.86 31.37,38.86 X1.15
SPEAKER1  (via drill 0.4)
  Top 0.203: v52.83,9.78 54.21,8.4 58.48,8.4 59.08,7.79 64.29,7.79 64.44,7.94 64.44,8.35 J2.28
  Top 0.254: v43.18,10.29 40.77,12.7 40.77,31.11 37.85,34.04 32.26,34.04 31.75,34.54 31.75,36.7 X1.16
  Bottom 0.254: v52.83,9.78 43.69,9.78 v43.18,10.29
SPI_ACCELEROMETER_CE0_N
  Top 0.203: J2.39 66.84,5.27 66.84,3.26 65.74,2.16 32.89,2.16 28.7,6.35 28.7,8.26 X1.37
SPI_ACCELEROMETER_CE1_N
  Top 0.203: J2.37 66.44,5.27 66.44,3.49 65.64,2.69 33.12,2.69 29.21,6.6 29.21,7.87 30.28,8.94 30.75,8.94 31.72,9.91 X1.38
SPI_ACCELEROMETER_MIS0  (via drill 0.4)
  Top 0.203: v48.13,14.73 51.69,14.73 53.34,13.08 65.02,13.08 66.89,11.22 J2.40
  Top 0.254: v35.05,14.48 33.02,12.45 X1.36
  Bottom 0.254: v48.13,14.73 41.78,14.73 40.01,16.51 37.21,16.51 35.18,14.48 v35.05,14.48
SPI_ACCELEROMETER_MOS1  (via drill 0.4)
  Top 0.203: v54.61,7.49 56.77,7.49 57.02,7.24 67.44,7.24 67.69,7.49 J2.44
  Top 0.254: v34.92,9.78 34.42,9.78 33.3,10.9 31.9,10.9 X1.35
  Bottom 0.254: v54.61,7.49 54.48,7.37 37.34,7.37 v34.92,9.78
SPI_ACCELEROMETER_SCLK  (via drill 0.4)
  Top 0.203: v48.77,13.59 51.82,13.59 52.83,12.57 64.77,12.57 66.49,10.86 J2.38
  Top 0.254: v37.59,15.24 33.15,15.24 X1.34
  Bottom 0.254: v48.77,13.59 41.53,13.59 39.88,15.24 v37.59,15.24
VCC
  Top 0.203: SJ_A5.1 22.86,21.88 22.86,22.61
  Top 0.254: 17.78,38.73 17.81,38.7 | 17.78,38.35 17.97,38.54 LED1.A
  Top 0.305: 17.66,28.7 U1.28
  Top 0.406: SJ_A5.1 SJ_A4.1 SJ_A3.1 SJ_A2.1 SJ_A1.1 SJ_A0.1 22.83,6.95 22.1,6.22 12.83,6.22 12.06,5.46 8.64,5.46 8,4.83 JP4.2 | 17.78,28.83 17.78,38.35 17.78,38.73 17.78,41.91 17.53,42.16 17.53,42.25 C1.1 16,42.8 15.75,43.05 15.75,44.96 15.24,45.47 15.24,46.74 14.73,47.24 14.73,48.51 13.65,49.59 R9.2 13.72,54.49 R8.2 13.21,57.15 8.76,57.15 8,57.91 JP3.2 | 17.78,28.83 17.78,24.26 18.41,23.62 22.48,23.62 22.86,23.24 22.86,22.61 | 17.78,28.83 17.66,28.7

## Text on the board
Top: EEL4915L_CMB-22Spring 00116 / Depth Perception Haptic System (DPHS) / Group 40
tPlace: V+ | VCC | SDA | SCL | OE | GND | 0 | 1 | 2 | C2 | 3 | 4 | 5 | 6 | 7 | PWM | GND | 8 | 9 | 10 | A5 | 11 | A4 | A3 | 12 | A2 | 13 | A1 | 14 | A0 | 15 | +RW | V+ | VCC | SDA | SCL | OE | GND
bPlace: 3-5V | 3-5V | Freq.: | V+: